# EAGLE board NeoJointV2A-075 (EAGLE 6.6.0)
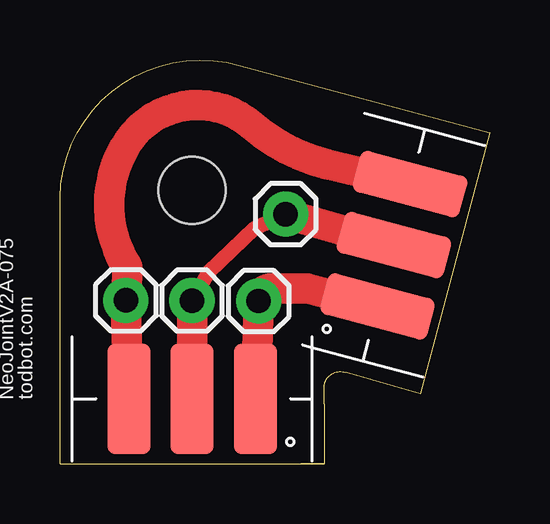
[diagram p0: board, top side]

Size 17.9 x 16.83 mm. Coordinates in mm from the lower left corner, seen from the top.
Outline: 10.03,0 0,0 0,11.1 arc-105 7.5,16.6 17.9,13.8 15,2.9 11.9,3.8 arc105 11,3.2 11,2.5 11,0
Outline: 10.03,0 11,0
Outline: 11,0 10.03,0
Copper layers (1*16): Top 0.0356mm / dielectric 1.5011mm / Bottom 0.0356mm
Design rules "LaenPCBOrder-tod": minimum track width 10mil, minimum drill 13mil, track to track 6mil, track to pad 8mil, pad to pad 8mil, via to via 8mil, smd to smd 6mil, copper to edge 15mil, drill to drill 8mil, minimum pad ring 7mil, minimum via ring 7mil, stop-mask expansion 4mil, vias tented up to drill 25mil, thermal gap 10mil
Holes 2.8 mm at 5.5,11.4

## Footprints (pad centres in the part's own frame; a part is rotated, then mirrored left to right if it is on the bottom)
1X01 = drill 1.016 pad 1.88: 1 0,0
LEDSTRIP-3P = smd 4.6 x 1.8: A 0,-2.65; B 0,0; C 0,2.63

## Placement (x,y rotation side)
JP1  [1X01]  8.28,6.78 0 top
JP2  [1X01]  9.4,10.4 0 top
JP3  [1X01]  2.75,6.81 0 top
JP4  [1X01]  5.5,6.8 0 top
U$1  LED_STRIP_3P  [LEDSTRIP-3P]  5.5,2.7 90 top
U$2  LED_STRIP_3P  [LEDSTRIP-3P]  13.91,9.11 345 top

## Library data of the parts
JP1-JP4 = SparkFun-Connectors
U$1 U$2 = todstuff

## Nets
A: JP1.1 U$1.A U$2.A
B: JP2.1 JP4.1 U$1.B U$2.B
C: JP3.1 U$1.C U$2.C

## Tracks (layer width: path | path; a pad name or v marks a point on that pad's centre or on a via)
A
  Top 1.27: U$2.A 10.3,7.3 8.8,7.3 arc90 JP1.1 U$1.A
B
  Top 0.61: JP4.1 6.2,8 8.1,9.8 JP2.1
  Top 1.27: U$1.B JP4.1 | U$2.B JP2.1
C
  Top 1.27: U$1.C 2.77,5.99 | 2.77,5.99 JP3.1 | U$2.C 11.1,12.5 arc-27 8,14.1 arc101 2.7,13.2 arc63 2.8,8.2 2.77,5.99

## Text on the board
tPlace: NeoJointV2A-075 | todbot.com